# EAGLE board SmartSensorWifi (EAGLE 6.5.0)
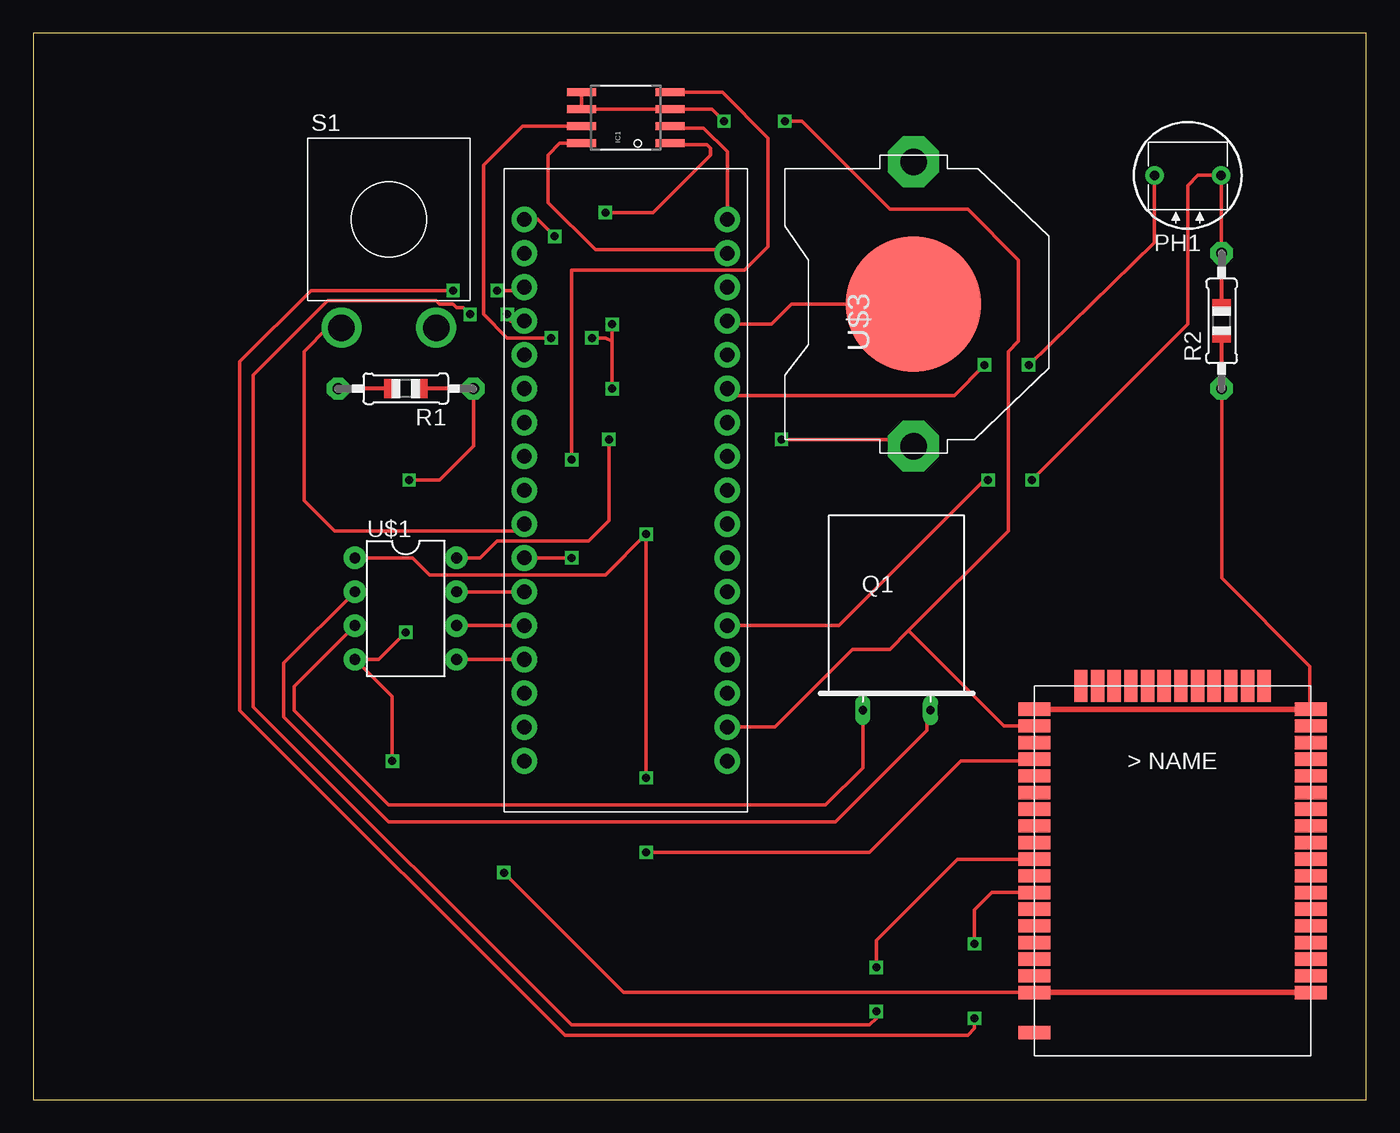
[diagram p0: board, top side]
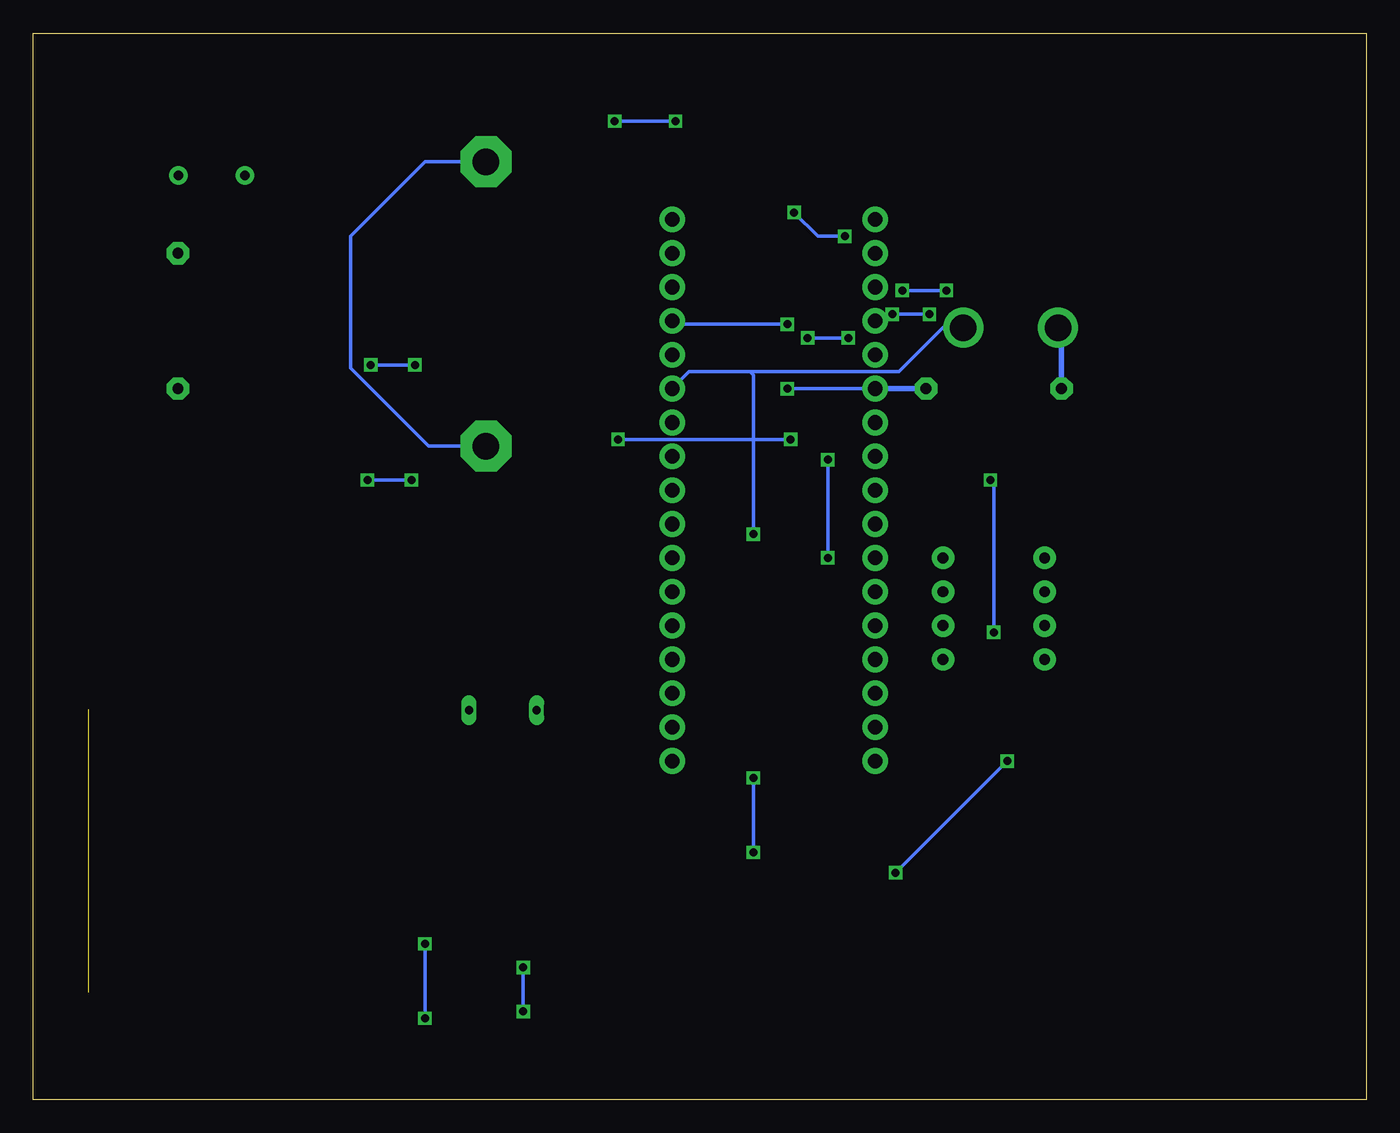
[diagram p1: board, bottom side, seen from below]

Size 100 x 80 mm. Coordinates in mm from the lower left corner, seen from the top.
Outline: 0,0 100,0 100,80 0,80 0,0
Copper layers (1*16): Top 0.035mm / dielectric 1.5mm / Bottom 0.035mm
Design rules "default": minimum track width 10mil, minimum drill 24mil, track to track 8mil, track to pad 8mil, pad to pad 8mil, via to via 8mil, smd to smd 8mil, copper to edge 40mil, drill to drill 8mil, minimum pad ring 10mil, minimum via ring 8mil, stop-mask expansion 4mil, vias tented up to drill 0mil, thermal gap 10mil

## Footprints (pad centres in the part's own frame; a part is rotated, then mirrored left to right if it is on the bottom)
SOIC8_208MIL = smd 0.6 x 2.2: 1 -1.905,-3.315; 2 -0.635,-3.315; 3 0.635,-3.315; 4 1.905,-3.315; 5 1.905,3.315; 6 0.635,3.315; 7 -0.635,3.315; 8 -1.905,3.315
D11XX = drill 0.7 pad 1.4: 1 -2.5,0; 2 2.5,0
Q = drill 0.61 long: 1 -2.54,-7.62; 2 2.54,-7.62
0805-THM = drill 0.813 pad 1.676 octagon: 1 -5.08,0; 2 5.08,0
JUDCOSPST = drill 2: P 3.556,-8.128; T -3.556,-8.128
DIL08-ROUND = drill 0.813 pad 1.676: 1 -3.81,-3.81; 2 -1.27,-3.81; 3 1.27,-3.81; 4 3.81,-3.81; 5 3.81,3.81; 6 1.27,3.81; 7 -1.27,3.81; 8 -3.81,3.81
ARDUINOMICRO = drill 1.1 pad 1.93: P$1 -20.32,7.62; P$2 -17.78,7.62; P$3 -15.24,7.62; P$4 -12.7,7.62; P$5 -10.16,7.62; P$6 -7.62,7.62; P$7 -5.08,7.62; P$8 -2.54,7.62; P$9 0,7.62; P$10 2.54,7.62; P$11 5.08,7.62; P$12 12.7,-7.62; P$13 10.16,-7.62; P$14 12.7,7.62; P$15 15.24,7.62; P$16 17.78,7.62; P$17 20.32,7.62; P$18 20.32,-7.62; P$19 17.78,-7.62; P$20 15.24,-7.62; P$21 7.62,7.62; P$22 10.16,7.62; P$23 7.62,-7.62; P$24 5.08,-7.62; P$25 2.54,-7.62; P$26 0,-7.62; P$27 -2.54,-7.62; P$28 -5.08,-7.62; P$29 -7.62,-7.62; P$30 -10.16,-7.62; P$31 -12.7,-7.62; P$32 -15.24,-7.62; P$33 -17.78,-7.62; P$34 -20.32,-7.62
CR2032-THRU = drill 2 pad 3.81 octagon: +1 -10.668,0; +2 10.668,0 | smd 10.16 x 10.16: - 0,0
WIZFI210 = smd 2.4 x 1: 1 -10.75,9.5; 2 -10.75,8.25; 3 -10.75,7; 4 -10.75,5.75; 5 -10.75,4.5; 6 -10.75,3.25; 7 -10.75,2; 8 -10.75,0.75; 9 -10.75,-0.5; 10 -10.75,-1.75; 11 -10.75,-3; 12 -10.75,-4.25; 13 -10.75,-5.5; 14 -10.75,-6.75; 15 -10.75,-8; 16 -10.75,-9.25; 17 -10.75,-10.5; 18 -10.75,-11.75; 31 10,-11.75; 32 10,-10.5; 33 10,-9.25; 34 10,-8; 35 10,-6.75; 36 10,-5.5; 37 10,-4.25; 38 10,-3; 39 10,-1.75; 40 10,-0.5; 41 10,0.75; 42 10,2; 43 10,3.25; 44 10,4.5; 45 10,5.75; 46 10,7; 47 10,8.25; 48 10,9.5; 49 10,12.5 | smd 1 x 2.4: 19 -7.25,-13.5; 20 -6,-13.5; 21 -4.75,-13.5; 22 -3.5,-13.5; 23 -2.25,-13.5; 24 -1,-13.5; 25 0.25,-13.5; 26 1.5,-13.5; 27 2.75,-13.5; 28 4,-13.5; 29 5.25,-13.5; 30 6.5,-13.5

## Placement (x,y rotation side)
IC1  AT45DB-S  [SOIC8_208MIL]  44.45,73.66 90 top
PH1  D1160_12  [D11XX]  86.61,69.34 0 top
Q1  [Q]  64.77,36.83 0 top
R1  [0805-THM]  27.94,53.34 180 top
R2  [0805-THM]  89.15,58.42 90 top
S1  SPST  [JUDCOSPST]  26.67,66.04 0 top
U$1  DS1302  [DIL08-ROUND]  27.94,36.83 270 top
U$2  ARDUINOMICRO  [ARDUINOMICRO]  44.45,45.72 90 top
U$3  [CR2032-THRU]  66.04,59.69 90 top
WIFI1  WIZFI210  [WIZFI210]  85.09,17.53 180 top

## Library data of the parts
IC1 R1 R2 S1 U$1-U$3 = adafruit
PH1 = photo-elements
Q1 = special
WIFI1 = SmartSensorWifi

## Nets
GND: IC1.7 R1.1 R2.1 U$1.4 U$2.P$12 U$2.P$21 U$3.- WIFI1.1 WIFI1.18 WIFI1.31 WIFI1.48
N$1: U$1.5 U$2.P$4
N$2: Q1.1 U$1.3
N$3: Q1.2 U$1.2
N$4: U$1.7 U$2.P$6
N$5: U$1.6 U$2.P$5
N$6: IC1.8 U$2.P$19
N$7: IC1.2 U$2.P$18
N$8: IC1.1 U$2.P$17
N$9: IC1.3 IC1.5 IC1.6 U$2.P$33 WIFI1.32
N$10: U$1.8 U$3.+1 U$3.+2
N$11: IC1.4 U$2.P$7
N$12: R1.2 S1.T U$2.P$8
N$13: U$2.P$14 WIFI1.40
N$14: U$2.P$15 WIFI1.42
N$15: PH1.2 R2.2 U$2.P$30
VBAT: WIFI1.9
VCC: PH1.1 S1.P U$1.1 U$2.P$23 WIFI1.34
VOUT_1V8: WIFI1.17

## Tracks (layer width: path | path; a pad name or v marks a point on that pad's centre or on a via)
GND  (via drill 0.6)  (1 unrouted)
  Top 0.254: v43.43,53.34 43.43,56.9 | 43.43,56.9 v43.43,58.17 | U$3.- 56.9,59.69 55.37,58.17 52.32,58.17 U$2.P$12 | IC1.7 36.7,73.03 33.78,70.1 33.78,58.93 35.56,57.15 v38.86,57.15 | v41.91,57.15 42.93,57.15 43.43,56.9 | v27.94,35.05 25.91,33.02 U$1.4 26.92,30.23 v26.92,25.4 | v28.19,46.48 30.48,46.48 33.02,49.02 R1.1 | WIFI1.48 44.3,8.03 v35.31,17.02 | R2.1 89.15,39.12 95.76,32.51 95.76,29.36 WIFI1.18
  Top 0.406: WIFI1.1 WIFI1.48 | WIFI1.18 WIFI1.31
  Bottom 0.254: U$2.P$21 v43.43,53.34 | v43.43,58.17 51.82,58.17 U$2.P$12 | v38.86,57.15 v41.91,57.15 | v27.94,35.05 27.94,46.23 v28.19,46.48 | v35.31,17.02 v26.92,25.4
  Bottom 0.406: U$2.P$21 R1.1
N$1
  Top 0.254: U$1.5 U$2.P$4 37.34,33.02
N$2
  Top 0.254: Q1.1 62.23,24.89 59.44,22.1 26.67,22.1 19.56,29.21 19.56,30.99 U$1.3
N$3
  Top 0.254: U$1.2 18.8,32.77 18.8,28.7 26.67,20.83 60.2,20.83 67.06,27.69 67.06,28.96 Q1.2
N$4
  Top 0.254: U$1.7 U$2.P$6
N$5
  Top 0.254: U$1.6 U$2.P$5
N$6
  Top 0.254: IC1.8 39.5,71.75 38.61,70.87 38.61,67.31 42.16,63.75 51.82,63.75 U$2.P$19
N$7
  Top 0.254: U$2.P$18 52.07,71.12 50.29,72.9 47.89,72.9 IC1.2
N$8  (via drill 0.6)
  Top 0.254: U$2.P$17 37.85,66.04 v39.12,64.77 | v42.93,66.55 46.48,66.55 50.8,70.87 50.8,71.37 50.55,71.63 47.89,71.63 IC1.1
  Bottom 0.254: v39.12,64.77 41.15,64.77 v42.93,66.55
N$9  (via drill 0.6)
  Top 0.254: IC1.5 IC1.6 IC1.3 50.93,74.3 v51.82,73.41 | v56.39,73.41 57.66,73.41 64.26,66.8 70.1,66.8 73.91,62.99 73.91,56.9 73.15,56.13 73.15,42.67 65.66,35.18 | 65.66,35.18 64.26,33.78 61.47,33.78 55.63,27.94 U$2.P$33 | WIFI1.32 72.81,28.03 65.66,35.18
  Bottom 0.254: v51.82,73.41 v56.39,73.41
N$10  (via drill 0.6)
  Top 0.254: U$1.8 33.53,40.64 34.8,41.91 41.66,41.91 43.18,43.43 v43.18,49.53 | v56.13,49.53 65.53,49.53 U$3.+1
  Bottom 0.254: U$3.+1 70.36,49.02 76.2,54.86 76.2,64.77 70.61,70.36 U$3.+2 | v43.18,49.53 v56.13,49.53
N$11  (via drill 0.6)
  Top 0.254: U$2.P$7 v40.39,40.64 | v40.39,48.01 40.39,62.23 53.34,62.23 55.12,64.01 55.12,72.14 51.69,75.56 IC1.4
  Bottom 0.254: v40.39,40.64 v40.39,48.01
N$12
  Top 0.254: S1.T 22.1,57.91 20.32,56.13 20.32,44.96 22.61,42.67 36.32,42.67 U$2.P$8
  Bottom 0.406: S1.T 22.86,57.91 R1.2
N$13  (via drill 0.6)
  Top 0.254: U$2.P$14 35.81,58.42 v35.56,58.93 | v32.77,58.93 32.26,59.44 31.75,59.44 31.5,59.69 30.48,59.69 30.23,59.94 22.1,59.94 16.51,54.36 16.51,29.46 40.39,5.59 62.74,5.59 63.25,6.1 v63.25,6.6 | v63.25,9.91 63.25,11.94 69.34,18.03 WIFI1.40
  Bottom 0.254: v35.56,58.93 v32.77,58.93 | v63.25,6.6 v63.25,9.91
N$14  (via drill 0.6)
  Top 0.254: WIFI1.42 71.91,15.53 70.61,14.22 v70.61,11.68 | v70.61,6.1 70.61,5.33 70.1,4.83 39.88,4.83 15.49,29.21 15.49,55.37 20.83,60.71 v31.5,60.71 | v34.8,60.71 36.58,60.71 U$2.P$15
  Bottom 0.254: v70.61,11.68 v70.61,6.1 | v31.5,60.71 v34.8,60.71
N$15  (via drill 0.6)
  Top 0.254: R2.2 89.11,63.54 PH1.2 87.38,69.34 86.61,68.58 86.61,58.17 v74.93,46.48 | v71.63,46.48 71.37,46.48 60.45,35.56 U$2.P$30
  Bottom 0.254: v74.93,46.48 v71.63,46.48
VCC  (via drill 0.6)
  Top 0.254: U$1.1 28.45,40.64 29.72,39.37 42.93,39.37 v45.97,42.42 v45.97,24.13 | v45.97,18.54 62.74,18.54 69.6,25.4 74.96,25.4 WIFI1.34 | PH1.1 84.11,64.3 v74.68,55.12 | v71.37,55.12 69.09,52.83 52.58,52.83 U$2.P$23
  Bottom 0.254: S1.P 31.75,57.91 35.05,54.61 46.23,54.61 | 46.23,54.61 50.8,54.61 U$2.P$23 | v45.97,42.42 45.97,54.36 46.23,54.61 | v45.97,24.13 v45.97,18.54 | v74.68,55.12 v71.37,55.12